# Altium PCB 6_LDCU_connector board(V21_zb).PcbDoc (part 3 of 4)
Units mil, origin at the board's own origin, x right, y up, seen from the top; angles counter-clockwise.
Board outline 11811.02 x 4135 mil, 2 copper layers (Top, Bottom), stack 12.7 mil thick; 37 components, 473 nets, 963 pads, 1 vias.
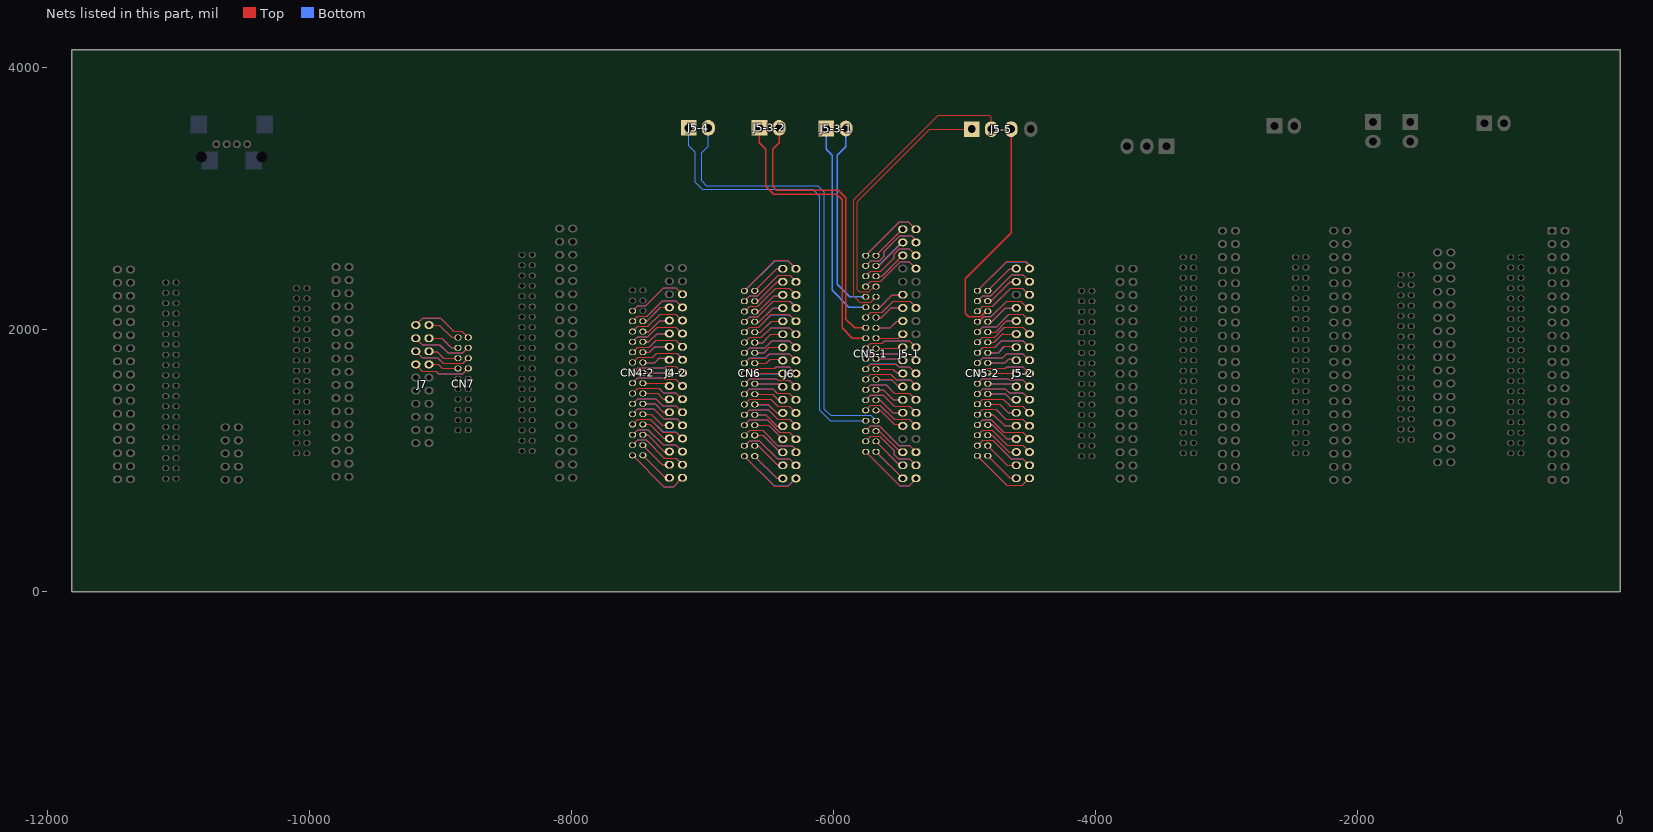
[diagram p3: the nets of this part, all layers, seen from the top]

## Via types
v1: diameter 20, hole 14, Top to Bottom, 1 vias

## Nets (pads, with @x,y where several pads share a name; then routed paths per layer and width w, separated by ;. In a path a pad name is that pad's centre, name@x,y a point inside that pad or via, vN(x,y) a via of type N, cw(c..) or ccw(c..) an arc to the next point about the centre after c; other vN are vias at no path point) (continued)
CN4-2_P6: CN4-2.6 J4-2.6 | length 949.9
  Top w7.87: CN4-2.6@-7533.86,2143.54 -7494.49,2182.91 -7432.28,2182.91 -7294.49,2320.71 -7203.54,2320.71 J4-2.6@-7153.15,2270.32
  Bottom w7.87: CN4-2.6@-7533.86,2143.54 -7494.49,2182.91 -7432.28,2182.91 -7294.49,2320.71 -7203.54,2320.71 J4-2.6@-7153.15,2270.32
CN4-2_P7: CN4-2.7 J4-2.7 | length 493.3
  Top w7.87: CN4-2.7@-7455.12,2064.8 -7426.77,2064.8 -7321.26,2170.32 J4-2.7@-7253.15,2170.32
  Bottom w7.87: CN4-2.7@-7455.12,2064.8 -7425.98,2064.8 -7318.11,2172.68 -7315.75,2170.32 J4-2.7@-7253.15,2170.32
CN4-2_P8: CN4-2.8 J4-2.8 | length 934.3
  Top w7.87: CN4-2.8@-7533.86,2064.8 -7494.49,2104.17 -7423.62,2104.17 -7305.91,2221.89 -7204.72,2221.89 J4-2.8@-7153.15,2170.32
  Bottom w7.87: CN4-2.8@-7533.86,2064.8 -7494.09,2104.57 -7422.44,2104.57 -7305.12,2221.89 -7204.72,2221.89 J4-2.8@-7153.15,2170.32
CN4-2_P9: CN4-2.9 J4-2.9 | length 473.7
  Top w7.87: CN4-2.9@-7455.12,1986.06 -7411.81,1986.06 -7327.56,2070.32 J4-2.9@-7253.15,2070.32
  Bottom w7.87: CN4-2.9@-7455.12,1986.06 -7411.02,1986.06 -7326.77,2070.32 J4-2.9@-7253.15,2070.32
CN4-2_P10: CN4-2.10 J4-2.10 | length 913.4
  Top w7.87: CN4-2.10@-7533.86,1986.06 -7494.49,2025.43 -7416.14,2025.43 -7321.65,2119.92 -7202.76,2119.92 J4-2.10@-7153.15,2070.32
  Bottom w7.87: CN4-2.10@-7533.86,1986.06 -7494.88,2025.04 -7417.72,2025.04 -7322.83,2119.92 -7202.76,2119.92 J4-2.10@-7153.15,2070.32
CN4-2_P11: CN4-2.11 J4-2.11 | length 456.1
  Top w7.87: CN4-2.11@-7455.12,1907.32 -7409.84,1907.32 -7346.85,1970.32 J4-2.11@-7253.15,1970.32
  Bottom w7.87: CN4-2.11@-7455.12,1907.32 -7408.66,1907.32 -7345.67,1970.32 J4-2.11@-7253.15,1970.32
CN4-2_P12: CN4-2.12 J4-2.12 | length 895.8
  Top w7.87: CN4-2.12@-7533.86,1907.32 -7494.49,1946.69 -7419.69,1946.69 -7346.46,2019.92 -7202.76,2019.92 J4-2.12@-7153.15,1970.32
  Bottom w7.87: CN4-2.12@-7533.86,1907.32 -7493.7,1947.48 -7418.9,1947.48 -7346.46,2019.92 -7202.76,2019.92 J4-2.12@-7153.15,1970.32
CN4-2_P13: CN4-2.13 J4-2.13 | length 439.1
  Top w7.87: CN4-2.13@-7455.12,1828.58 -7403.94,1828.58 -7362.2,1870.32 J4-2.13@-7253.15,1870.32
  Bottom w7.87: CN4-2.13@-7455.12,1828.58 -7455.12,1828.19 -7405.91,1828.19 -7363.78,1870.32 J4-2.13@-7253.15,1870.32
CN4-2_P14: CN4-2.14 J4-2.14 | length 878.2
  Top w7.87: CN4-2.14@-7533.86,1828.58 -7494.49,1867.95 -7407.87,1867.95 -7355.51,1920.32 -7203.15,1920.32 J4-2.14@-7153.15,1870.32
  Bottom w7.87: CN4-2.14@-7533.86,1828.58 -7495.28,1867.17 -7406.69,1867.17 -7354.33,1919.53 -7202.76,1919.53 -7153.54,1870.32 J4-2.14@-7153.15,1870.32
CN4-2_P15: CN4-2.15 J4-2.15 | length 462.4
  Top w7.87: CN4-2.15@-7455.12,1749.84 -7364.57,1749.84 -7329.13,1785.28 -7262.2,1785.28 -7253.15,1776.22 J4-2.15@-7253.15,1770.32
  Bottom w7.87: CN4-2.15@-7455.12,1749.84 -7363.78,1749.84 -7329.53,1784.09 -7259.84,1784.09 -7259.84,1765.98 -7257.48,1765.98 J4-2.15@-7253.15,1770.32
CN4-2_P16: CN4-2.16 J4-2.16 | length 873.6
  Top w7.87: CN4-2.16@-7533.86,1749.84 -7494.49,1789.21 -7380.31,1789.21 -7349.21,1820.32 -7194.88,1820.32 -7153.15,1778.58 J4-2.16@-7153.15,1770.32
  Bottom w7.87: CN4-2.16@-7533.86,1749.84 -7493.7,1790 -7380.31,1790 -7350,1820.32 -7193.7,1820.32 -7150.79,1777.4 -7150.79,1772.68 J4-2.16@-7153.15,1770.32
CN4-2_P17: CN4-2.17 J4-2.17 | length 404.6
  Top w7.87: CN4-2.17@-7455.12,1671.1 -7253.94,1671.1 J4-2.17@-7253.15,1670.32
  Bottom w7.87: CN4-2.17@-7455.12,1671.1 -7454.33,1670.32 J4-2.17@-7253.15,1670.32
CN4-2_P18: CN4-2.18 J4-2.18 | length 846.2
  Top w7.87: CN4-2.18@-7533.86,1671.1 -7494.49,1710.47 -7285.83,1710.47 -7274.02,1722.28 -7205.12,1722.28 J4-2.18@-7153.15,1670.32
  Bottom w7.87: CN4-2.18@-7533.86,1671.1 -7494.88,1710.08 -7287.8,1710.08 -7276.38,1721.5 -7204.33,1721.5 J4-2.18@-7153.15,1670.32
CN4-2_P19: CN4-2.19 J4-2.19 | length 436.4
  Top w7.87: CN4-2.19@-7455.12,1592.36 -7266.14,1592.36 -7253.15,1579.37 J4-2.19@-7253.15,1570.32
  Bottom w7.87: CN4-2.19@-7455.12,1592.36 -7266.14,1592.36 -7248.82,1575.04 -7248.82,1574.65 J4-2.19@-7253.15,1570.32
CN4-2_P20: CN4-2.20 J4-2.20 | length 845.2
  Top w7.87: CN4-2.20@-7533.86,1592.36 -7494.49,1631.73 -7305.51,1631.73 -7296.06,1622.28 -7205.12,1622.28 J4-2.20@-7153.15,1570.32
  Bottom w7.87: CN4-2.20@-7533.86,1592.36 -7494.09,1632.13 -7305.12,1632.13 -7294.88,1621.89 -7204.72,1621.89 J4-2.20@-7153.15,1570.32
CN4-2_P21: CN4-2.21 J4-2.21 | length 439.8
  Top w7.87: CN4-2.21@-7455.12,1513.62 -7342.91,1513.62 -7299.61,1470.32 J4-2.21@-7253.15,1470.32
  Bottom w7.87: CN4-2.21@-7455.12,1513.62 -7343.31,1513.62 -7300,1470.32 J4-2.21@-7253.15,1470.32
CN4-2_P22: CN4-2.22 J4-2.22 | length 861.9
  Top w7.87: CN4-2.22@-7533.86,1513.62 -7494.88,1552.6 -7332.28,1552.6 -7300.39,1520.71 -7203.54,1520.71 J4-2.22@-7153.15,1470.32
  Bottom w7.87: CN4-2.22@-7533.86,1513.62 -7494.88,1552.6 -7331.89,1552.6 -7300,1520.71 -7203.54,1520.71 J4-2.22@-7153.15,1470.32
CN4-2_P23: CN4-2.23 J4-2.23 | length 457.4
  Top w7.87: CN4-2.23@-7455.12,1434.88 -7364.57,1434.88 -7300,1370.32 J4-2.23@-7253.15,1370.32
  Bottom w7.87: CN4-2.23@-7455.12,1434.88 -7361.81,1434.88 -7298.03,1371.1 -7253.94,1371.1 J4-2.23@-7253.15,1370.32
CN4-2_P24: CN4-2.24 J4-2.24 | length 880.1
  Top w7.87: CN4-2.24@-7533.86,1434.88 -7494.49,1474.25 -7356.3,1474.25 -7301.57,1419.53 -7202.36,1419.53 J4-2.24@-7153.15,1370.32
  Bottom w7.87: CN4-2.24@-7533.86,1434.88 -7494.49,1474.25 -7356.3,1474.25 -7301.97,1419.92 -7202.76,1419.92 J4-2.24@-7153.15,1370.32
CN4-2_P25: CN4-2.25 J4-2.25 | length 475
  Top w7.87: CN4-2.25@-7455.12,1356.14 -7391.34,1356.14 -7305.51,1270.32 J4-2.25@-7253.15,1270.32
  Bottom w7.87: CN4-2.25@-7455.12,1356.14 -7391.73,1356.14 -7305.91,1270.32 J4-2.25@-7253.15,1270.32
CN4-2_P26: CN4-2.26 J4-2.26 | length 902.9
  Top w7.87: CN4-2.26@-7533.86,1356.14 -7494.49,1395.51 -7372.44,1395.51 -7296.85,1319.92 -7198.43,1319.92 -7153.15,1274.65 J4-2.26@-7153.15,1270.32
  Bottom w7.87: CN4-2.26@-7533.86,1356.14 -7494.09,1395.91 -7372.83,1395.91 -7296.06,1319.13 -7198.03,1319.13 -7156.3,1277.4 -7156.3,1273.46 J4-2.26@-7153.15,1270.32
CN4-2_P27: CN4-2.27 J4-2.27 | length 492.7
  Top w7.87: CN4-2.27@-7455.12,1277.4 -7401.97,1277.4 -7294.88,1170.32 J4-2.27@-7253.15,1170.32
  Bottom w7.87: CN4-2.27@-7455.12,1277.4 -7402.36,1277.4 -7295.28,1170.32 J4-2.27@-7253.15,1170.32
CN4-2_P28: CN4-2.28 J4-2.28 | length 916.8
  Top w7.87: CN4-2.28@-7533.86,1277.4 -7494.49,1316.77 -7399.21,1316.77 -7301.97,1219.53 -7202.36,1219.53 J4-2.28@-7153.15,1170.32
  Bottom w7.87: CN4-2.28@-7533.86,1277.4 -7493.7,1317.56 -7398.03,1317.56 -7300.79,1220.32 -7202.36,1220.32 -7152.76,1170.71 J4-2.28@-7153.15,1170.32
CN4-2_P29: CN4-2.29 J4-2.29 | length 510.3
  Top w7.87: CN4-2.29@-7455.12,1198.66 -7419.69,1198.66 -7291.34,1070.32 J4-2.29@-7253.15,1070.32
  Bottom w7.87: CN4-2.29@-7455.12,1198.66 -7419.29,1198.66 -7290.94,1070.32 J4-2.29@-7253.15,1070.32
CN4-2_P30: CN4-2.30 J4-2.30 | length 933.6
  Top w7.87: CN4-2.30@-7533.86,1198.66 -7494.49,1238.03 -7415.75,1238.03 -7300,1122.28 -7205.12,1122.28 J4-2.30@-7153.15,1070.32
  Bottom w7.87: CN4-2.30@-7533.86,1198.66 -7493.7,1238.82 -7416.93,1238.82 -7300,1121.89 -7204.72,1121.89 J4-2.30@-7153.15,1070.32
CN4-2_P31: CN4-2.31 J4-2.31 | length 527.9
  Top w7.87: CN4-2.31@-7455.12,1119.92 -7309.45,974.25 -7257.09,974.25 J4-2.31@-7253.15,970.32
  Bottom w7.87: CN4-2.31@-7455.12,1119.92 -7305.51,970.32 J4-2.31@-7253.15,970.32
CN4-2_P32: CN4-2.32 J4-2.32 | length 972.3
  Top w7.87: CN4-2.32@-7533.86,1119.92 -7494.49,1159.29 -7431.5,1159.29 -7292.52,1020.32 -7203.15,1020.32 J4-2.32@-7153.15,970.32
  Bottom w7.87: CN4-2.32@-7533.86,1119.92 -7494.88,1158.9 -7430.31,1158.9 -7292.13,1020.71 -7199.21,1020.71 -7144.09,965.59 -7148.43,965.59 J4-2.32@-7153.15,970.32
CN4-2_P33: CN4-2.33 J4-2.33 | length 545.5
  Top w7.87: CN4-2.33@-7455.12,1041.18 -7289.76,875.83 -7258.66,875.83 J4-2.33@-7253.15,870.32
  Bottom w7.87: CN4-2.33@-7455.12,1041.18 -7284.25,870.32 J4-2.33@-7253.15,870.32
CN4-2_P34: CN4-2.34 J4-2.34 | length 1014.5
  Top w7.87: CN4-2.34@-7533.86,1041.18 -7295.67,802.99 -7220.47,802.99 J4-2.34@-7153.15,870.32
  Bottom w7.87: CN4-2.34@-7533.86,1041.18 -7295.67,802.99 -7220.47,802.99 J4-2.34@-7153.15,870.32
CN5-1_P1: CN5-1.1 J5-1.1 | length 575.8
  Top w7.87: CN5-1.1@-5676.73,2565.47 -5487.76,2754.45 -5483.82,2754.45 J5-1.1@-5472.01,2766.26
  Bottom w7.87: CN5-1.1@-5676.73,2565.47 -5490.91,2751.3 -5486.97,2751.3 J5-1.1@-5472.01,2766.26
CN5-1_P2: CN5-1.2 J5-1.2 | length 1030.8
  Top w7.87: CN5-1.2@-5755.47,2565.47 -5495.63,2825.32 -5431.06,2825.32 J5-1.2@-5372.01,2766.26
  Bottom w7.87: CN5-1.2@-5755.47,2565.47 -5751.54,2569.41 -5751.54,2570.59 -5497.99,2824.13 -5429.88,2824.13 J5-1.2@-5372.01,2766.26
CN5-1_P3: CN5-1.3 J5-1.3 | length 560.8
  Top w7.87: CN5-1.3@-5676.73,2486.73 -5651.54,2486.73 J5-1.3@-5472.01,2666.26
  Bottom w7.87: CN5-1.3@-5676.73,2486.73 -5657.83,2486.73 -5475.16,2669.41 J5-1.3@-5472.01,2666.26
CN5-1_P4: CN5-1.4 J5-1.4 | length 1066.1
  Top w7.87: CN5-1.4@-5755.47,2486.73 -5753.9,2486.73 -5713.74,2526.89 -5650.35,2526.89 -5615.08,2562.16 -5615.08,2596.02 -5494.84,2716.26 -5406.26,2716.26 -5365.71,2675.71 -5365.71,2672.56 J5-1.4@-5372.01,2666.26
  Bottom w7.87: CN5-1.4@-5755.47,2486.73 -5715.31,2526.89 -5649.96,2526.89 -5614.92,2561.93 -5614.92,2597.76 -5496.02,2716.65 -5403.5,2716.65 -5370.83,2683.98 -5370.83,2667.44 J5-1.4@-5372.01,2666.26
CN5-1_P5: CN5-1.5 J5-1.5 | length 540.6
  Top w7.87: CN5-1.5@-5676.73,2407.99 -5630.28,2407.99 J5-1.5@-5472.01,2566.26
  Bottom w7.87: CN5-1.5@-5676.73,2407.99 -5631.06,2407.99 -5494.45,2544.61 -5493.66,2544.61 J5-1.5@-5472.01,2566.26
CN5-1_P6: CN5-1.6 J5-1.6 | length 1012.2
  Top w7.87: CN5-1.6@-5755.47,2407.99 -5716.1,2447.36 -5639.33,2447.36 -5538.15,2548.54 -5538.15,2574.13 -5495.63,2616.65 -5422.4,2616.65 J5-1.6@-5372.01,2566.26
  Bottom w7.87: CN5-1.6@-5755.47,2407.99 -5715.71,2447.76 -5639.72,2447.76 -5536.97,2550.51 -5536.97,2577.28 -5497.6,2616.65 -5422.4,2616.65 J5-1.6@-5372.01,2566.26
CN5-1_P7: CN5-1.7 J5-5.1 | length 1991.7
  Top w8: CN5-1.7@-5676.73,2329.25 -5691.77,2329.25 -5731.02,2290 -5806.02,2290 -5821.02,2305 -5821.02,2975 -5266.02,3530 J5-5.1@-4946.02,3530
  Top w10: J5-5.1@-4946.02,3530 J5-5.1@-4946.02,3580
CN5-1_P8: CN5-1.8 J5-1.8 | length 966.2
  Top w7.87: CN5-1.8@-5755.47,2329.25 -5716.1,2368.62 -5639.33,2368.62 -5490.12,2517.83 -5423.58,2517.83 J5-1.8@-5372.01,2466.26
  Bottom w7.87: CN5-1.8@-5755.47,2329.25 -5716.1,2368.62 -5639.72,2368.62 -5490.12,2518.23 -5423.98,2518.23 J5-1.8@-5372.01,2466.26
CN5-1_P9: CN5-1.9 J5-5.2 | length 2353.1
  Top w8: CN5-1.9@-5676.73,2250.51 -5717.24,2210 -5801.02,2210 -5846.02,2255 -5846.02,2990 -5201.02,3635 -4811.02,3635 -4796.02,3620 J5-5.2@-4796.02,3530
CN5-1_P10: CN5-1.10 J5-3-1.2 | length 1491.5
  Top w7.87: CN5-1.10@-5755.47,2250.51 CN5-1.10@-5745.51,2250.51
  Bottom w7.87: CN5-1.10@-5755.47,2250.51 CN5-1.10@-5745.51,2250.51
  Bottom w10: J5-3-1.2@-5906.02,3535 -5906.02,3395 -5971.02,3330 -5971.02,2345 -5876.54,2250.51 CN5-1.10@-5755.47,2250.51
CN5-1_P11: CN5-1.11 J5-1.11 | length 487.7
  Top w7.87: CN5-1.11@-5676.73,2171.77 -5645.24,2171.77 -5554.69,2262.32 -5475.94,2262.32 J5-1.11@-5472.01,2266.26
  Bottom w7.87: CN5-1.11@-5676.73,2171.77 -5647.2,2171.77 -5553.9,2265.08 -5473.19,2265.08 J5-1.11@-5472.01,2266.26
CN5-1_P12: CN5-1.12 J5-3-1.1 | length 1562.3
  Bottom w10: J5-3-1.1@-6056.02,3535 -6056.02,3375 -6011.02,3330 -6011.02,2300 -5882.8,2171.77 CN5-1.12@-5755.47,2171.77
CN5-1_P13: CN5-1.13 J5-1.13 | length 470.1
  Top w7.87: CN5-1.13@-5676.73,2093.03 -5635.39,2093.03 -5562.17,2166.26 J5-1.13@-5472.01,2166.26
  Bottom w7.87: CN5-1.13@-5676.73,2093.03 -5635,2093.03 -5561.77,2166.26 J5-1.13@-5472.01,2166.26
CN5-1_P14: CN5-1.14 J5-1.14 | length 924.6
  Top w7.87: CN5-1.14@-5755.47,2093.03 -5716.1,2132.4 -5631.46,2132.4 -5546.42,2217.44 -5419.25,2217.44 -5372.01,2170.2 J5-1.14@-5372.01,2166.26
  Bottom w7.87: CN5-1.14@-5755.47,2093.03 -5715.71,2132.8 -5630.28,2132.8 -5545.63,2217.44 -5416.89,2217.44 -5377.91,2178.46 -5377.91,2164.29 -5373.98,2164.29 J5-1.14@-5372.01,2166.26
CN5-1_P15: CN5-1.15 J5-1.15 | length 452.5
  Top w7.87: CN5-1.15@-5676.73,2014.29 -5567.28,2014.29 -5515.31,2066.26 J5-1.15@-5472.01,2066.26
  Bottom w7.87: CN5-1.15@-5676.73,2014.29 -5568.07,2014.29 -5517.28,2065.08 -5473.19,2065.08 J5-1.15@-5472.01,2066.26
CN5-1_P16: CN5-1.16 J5-3-2.2 | length 2165.8
  Top w10: J5-3-2.2@-6416.02,3540 -6416.02,3425 -6466.02,3375 -6466.02,3095 -6436.02,3065 -5966.02,3065 -5906.02,3005 -5906.02,2080 -5840.31,2014.29 CN5-1.16@-5755.47,2014.29
CN5-1_P17: CN5-1.17 J5-1.17 | length 434.9
  Top w7.87: CN5-1.17@-5676.73,1935.55 -5507.44,1935.55 -5487.76,1955.24 -5483.03,1955.24 J5-1.17@-5472.01,1966.26
  Bottom w7.87: CN5-1.17@-5676.73,1935.55 -5502.72,1935.55 J5-1.17@-5472.01,1966.26
CN5-1_P18: CN5-1.18 J5-3-2.1 | length 2277.7
  Top w10: J5-3-2.1@-6566.02,3540 -6566.02,3425 -6516.02,3375 -6516.02,3095 -6456.02,3035 -5981.02,3035 -5936.02,2990 -5936.02,2015 -5856.57,1935.55 CN5-1.18@-5755.47,1935.55
CN5-1_P19: CN5-1.19 J5-1.19 | length 417.3
  Top w7.87: CN5-1.19@-5676.73,1856.81 -5481.46,1856.81 J5-1.19@-5472.01,1866.26
  Bottom w7.87: CN5-1.19@-5676.73,1856.81 -5481.46,1856.81 J5-1.19@-5472.01,1866.26
CN5-1_P20: CN5-1.20 J5-1.20 | length 855.5
  Top w7.87: CN5-1.20@-5755.47,1856.81 -5716.1,1896.18 -5629.49,1896.18 -5610.98,1914.68 -5423.58,1914.68 -5389.33,1880.43 -5386.18,1880.43 J5-1.20@-5372.01,1866.26
  Bottom w7.87: CN5-1.20@-5755.47,1856.81 -5714.92,1897.36 -5628.31,1897.36 -5610.98,1914.68 -5419.65,1914.68 -5419.65,1913.9 J5-1.20@-5372.01,1866.26
CN5-1_P21: CN5-1.21 J5-1.21 | length 419.2
  Top w7.87: CN5-1.21@-5676.73,1778.07 -5483.82,1778.07 J5-1.21@-5472.01,1766.26
  Bottom w7.87: CN5-1.21@-5676.73,1778.07 -5485.79,1778.07 -5473.98,1766.26 J5-1.21@-5472.01,1766.26
CN5-1_P22: CN5-1.22 J5-1.22 | length 843.2
  Top w7.87: CN5-1.22@-5755.47,1778.07 -5715.31,1818.23 -5423.98,1818.23 J5-1.22@-5372.01,1766.26
  Bottom w7.87: CN5-1.22@-5755.47,1778.07 -5715.31,1818.23 -5423.98,1818.23 J5-1.22@-5372.01,1766.26
CN5-1_P23: CN5-1.23 J5-1.23 | length 441.1
  Top w7.87: CN5-1.23@-5676.73,1699.33 -5546.81,1699.33 -5513.74,1666.26 J5-1.23@-5472.01,1666.26
  Bottom w7.87: CN5-1.23@-5676.73,1699.33 -5547.2,1699.33 -5518.46,1670.59 -5470.83,1670.59 -5470.83,1667.44 J5-1.23@-5472.01,1666.26
CN5-1_P24: CN5-1.24 J5-1.24 | length 859.2
  Top w7.87: CN5-1.24@-5755.47,1699.33 -5716.5,1738.31 -5526.73,1738.31 -5504.29,1715.87 -5421.61,1715.87 J5-1.24@-5372.01,1666.26
  Bottom w7.87: CN5-1.24@-5755.47,1699.33 -5716.1,1738.7 -5524.37,1738.7 -5503.11,1717.44 -5423.19,1717.44 J5-1.24@-5372.01,1666.26
CN5-1_P25: CN5-1.25 J5-1.25 | length 454.5
  Top w7.87: CN5-1.25@-5676.73,1620.59 -5558.62,1620.59 -5504.29,1566.26 J5-1.25@-5472.01,1566.26
  Bottom w7.87: CN5-1.25@-5676.73,1620.59 -5675.94,1619.8 -5558.23,1619.8 -5504.69,1566.26 J5-1.25@-5472.01,1566.26
CN5-1_P26: CN5-1.26 J5-1.26 | length 884.2
  Top w7.87: CN5-1.26@-5755.47,1620.59 -5716.5,1659.57 -5564.13,1659.57 -5521.22,1616.65 -5416.89,1616.65 -5372.01,1571.77 J5-1.26@-5372.01,1566.26
  Bottom w7.87: CN5-1.26@-5755.47,1620.59 -5716.1,1659.96 -5564.13,1659.96 -5522.4,1618.23 -5416.89,1618.23 -5375.94,1577.28 -5375.94,1570.2 J5-1.26@-5372.01,1566.26
CN5-1_P27: CN5-1.27 J5-1.27 | length 472.9
  Top w7.87: CN5-1.27@-5676.73,1541.85 -5621.61,1541.85 -5546.02,1466.26 J5-1.27@-5472.01,1466.26
  Bottom w7.87: CN5-1.27@-5676.73,1541.85 -5621.61,1541.85 -5620.63,1542.83 -5544.06,1466.26 J5-1.27@-5472.01,1466.26
CN5-1_P28: CN5-1.28 J5-1.28 | length 893.5
  Top w7.87: CN5-1.28@-5755.47,1541.85 -5716.89,1580.43 -5601.14,1580.43 -5536.57,1515.87 -5421.61,1515.87 J5-1.28@-5372.01,1466.26
  Bottom w7.87: CN5-1.28@-5755.47,1541.85 -5716.89,1580.43 -5600.35,1580.43 -5535.79,1515.87 -5421.61,1515.87 J5-1.28@-5372.01,1466.26
CN5-1_P29: CN5-1.29 J5-1.29 | length 493.4
  Top w7.87: CN5-1.29@-5676.73,1463.11 -5645.24,1463.11 -5548.39,1366.26 J5-1.29@-5472.01,1366.26
  Bottom w7.87: CN5-1.29@-5676.73,1463.11 -5675.55,1464.29 -5675.55,1466.26 -5648.78,1466.26 -5548.78,1366.26 J5-1.29@-5472.01,1366.26
CN5-1_P30: CN5-1.30 J5-1.30 | length 920.5
  Top w7.87: CN5-1.30@-5755.47,1463.11 -5716.5,1502.09 -5625.16,1502.09 -5538.94,1415.87 -5421.61,1415.87 J5-1.30@-5372.01,1366.26
  Bottom w7.87: CN5-1.30@-5755.47,1463.11 -5716.89,1501.69 -5622.4,1501.69 -5536.97,1416.26 -5420.83,1416.26 -5368.46,1363.9 -5369.65,1363.9 J5-1.30@-5372.01,1366.26
CN5-1_P31: CN5-1.31 J5-1.31 | length 515.8
  Top w7.87: CN5-1.31@-5676.73,1384.37 -5645.24,1384.37 -5538.94,1278.07 -5483.82,1278.07 J5-1.31@-5472.01,1266.26
  Bottom w7.87: CN5-1.31@-5676.73,1384.37 -5643.66,1384.37 -5538.15,1278.86 -5471.22,1278.86 -5471.22,1267.05 J5-1.31@-5472.01,1266.26
CN5-1_P32: CN5-1.32 J5-1.32 | length 931.3
  Top w7.87: CN5-1.32@-5755.47,1384.37 -5715.31,1424.53 -5646.02,1424.53 -5537.36,1315.87 -5421.61,1315.87 J5-1.32@-5372.01,1266.26
  Bottom w7.87: CN5-1.32@-5755.47,1384.37 -5715.31,1424.53 -5646.42,1424.53 -5537.76,1315.87 -5421.61,1315.87 J5-1.32@-5372.01,1266.26
CN5-1_P33: CN5-1.33 J5-4.2 | length 3482.2
  Bottom w7.87: J5-4.2@-6956.02,3540 -6956.02,3400 -7006.02,3350 -7006.02,3135 -6971.02,3100 -6121.02,3100 -6071.02,3050 -6071.02,1395 -6021.81,1345.79 -5716.89,1345.79 CN5-1.33@-5676.73,1305.63
CN5-1_P34: CN5-1.34 J5-4.1 | length 3444.7
  Bottom w7.87: J5-4.1@-7106.02,3540 -7106.02,3405 -7056.02,3355 -7056.02,3125 -7001.02,3070 -6161.02,3070 -6106.02,3015 -6106.02,1385 -6026.65,1305.63 CN5-1.34@-5755.47,1305.63
CN5-1_P35: CN5-1.35 J5-1.35 | length 546.4
  Top w7.87: CN5-1.35@-5676.73,1226.89 -5650.75,1226.89 -5501.14,1077.28 -5483.03,1077.28 J5-1.35@-5472.01,1066.26
  Bottom w7.87: CN5-1.35@-5676.73,1226.89 -5650.75,1226.89 -5485.39,1061.54 -5476.73,1061.54 J5-1.35@-5472.01,1066.26
CN5-1_P36: CN5-1.36 J5-1.36 | length 968.4
  Top w7.87: CN5-1.36@-5755.47,1226.89 -5715.71,1266.65 -5653.5,1266.65 -5503.5,1116.65 -5420.83,1116.65 -5372.01,1067.83 J5-1.36@-5372.01,1066.26
  Bottom w7.87: CN5-1.36@-5755.47,1226.89 -5756.26,1227.68 -5717.28,1266.65 -5651.93,1266.65 -5502.32,1117.05 -5422.8,1117.05 J5-1.36@-5372.01,1066.26
CN5-1_P37: CN5-1.37 J5-1.37 | length 571.7
  Top w7.87: CN5-1.37@-5676.73,1148.15 -5672.8,1144.21 -5672.8,1140.28 -5498.78,966.26 J5-1.37@-5472.01,966.26
  Bottom w7.87: CN5-1.37@-5676.73,1148.15 -5503.11,974.53 -5468.86,974.53 -5468.86,969.41 J5-1.37@-5472.01,966.26
CN5-1_P38: CN5-1.38 J5-1.38 | length 1016.6
  Top w7.87: CN5-1.38@-5755.47,1148.15 -5716.1,1187.52 -5648.39,1187.52 -5536.18,1075.32 -5536.18,1047.36 -5505.08,1016.26 -5422.01,1016.26 J5-1.38@-5372.01,966.26
  Bottom w7.87: CN5-1.38@-5755.47,1148.15 -5714.92,1188.7 -5649.57,1188.7 -5536.97,1076.1 -5536.97,1048.15 -5505.08,1016.26 -5422.01,1016.26 J5-1.38@-5372.01,966.26
CN5-1_P39: CN5-1.39 J5-1.39 | length 577.7
  Top w7.87: CN5-1.39@-5676.73,1069.41 -5675.16,1069.41 J5-1.39@-5472.01,866.26
  Bottom w7.87: CN5-1.39@-5676.73,1069.41 -5473.58,866.26 J5-1.39@-5472.01,866.26
CN5-1_P40: CN5-1.40 J5-1.40 | length 1033.4
  Top w7.87: CN5-1.40@-5755.47,1069.41 -5495.63,809.57 -5424.76,809.57 -5372.01,862.32 J5-1.40@-5372.01,866.26
  Bottom w7.87: CN5-1.40@-5755.47,1069.41 -5497.2,811.14 -5421.61,811.14 -5372.01,860.75 J5-1.40@-5372.01,866.26
CN5-2_P1: CN5-2.1 J5-2.1 | length 575.7
  Top w7.87: CN5-2.1@-4824.09,2297.36 -4654.8,2466.65 J5-2.1@-4606.38,2466.65
  Bottom w7.87: CN5-2.1@-4824.09,2297.36 -4654.8,2466.65 J5-2.1@-4606.38,2466.65
CN5-2_P2: CN5-2.2 J5-2.2 | length 1059.1
  Top w7.87: CN5-2.2@-4902.83,2297.36 -4678.43,2521.77 -4540.63,2521.77 -4506.38,2487.52 J5-2.2@-4506.38,2466.65
  Bottom w7.87: CN5-2.2@-4902.83,2297.36 -4680,2520.2 -4530,2520.2 -4498.9,2489.09 -4498.9,2474.13 J5-2.2@-4506.38,2466.65
CN5-2_P3: CN5-2.3 J5-2.3 | length 559
  Top w7.87: CN5-2.3@-4824.09,2218.62 -4800.47,2218.62 -4652.44,2366.65 J5-2.3@-4606.38,2366.65
  Bottom w7.87: CN5-2.3@-4824.09,2218.62 -4822.13,2220.59 -4822.13,2222.17 -4797.32,2222.17 -4652.83,2366.65 J5-2.3@-4606.38,2366.65
CN5-2_P4: CN5-2.4 J5-2.4 | length 1004.6
  Top w7.87: CN5-2.4@-4902.83,2218.62 -4862.68,2258.78 -4798.9,2258.78 -4639.84,2417.83 -4557.56,2417.83 J5-2.4@-4506.38,2366.65
  Bottom w7.87: CN5-2.4@-4902.83,2218.62 -4904.41,2220.2 -4904.41,2222.17 -4896.54,2222.17 -4860.71,2257.99 -4799.69,2257.99 -4639.84,2417.83 -4557.56,2417.83 J5-2.4@-4506.38,2366.65
CN5-2_P5: CN5-2.5 J5-5.3 | length 1798.8
  Top w10: CN5-2.5@-4824.09,2139.88 -4837.27,2139.88 -4877.15,2100 -4971.02,2100 -4996.02,2125 -4996.02,2390 -4646.02,2740 J5-5.3@-4646.02,3530 J5-5.3@-4646.02,3580
CN5-2_P6: CN5-2.6 J5-2.6 | length 990.2
  Top w7.87: CN5-2.6@-4902.83,2139.88 -4863.46,2179.25 -4788.66,2179.25 -4650.08,2317.83 -4557.56,2317.83 J5-2.6@-4506.38,2266.65
  Bottom w7.87: CN5-2.6@-4902.83,2139.88 -4862.28,2180.43 -4784.33,2180.43 -4646.93,2317.83 -4559.53,2317.83 -4509.92,2268.23 -4509.92,2262.32 -4506.38,2265.87 J5-2.6@-4506.38,2266.65
CN5-2_P7: CN5-2.7 J5-2.7 | length 522.8
  Top w7.87: CN5-2.7@-4824.09,2061.14 -4796.54,2061.14 -4691.02,2166.65 J5-2.7@-4606.38,2166.65
  Bottom w7.87: CN5-2.7@-4824.09,2061.14 -4795.35,2061.14 -4692.2,2164.29 -4608.74,2164.29 J5-2.7@-4606.38,2166.65
CN5-2_P8: CN5-2.8 J5-2.8 | length 962.5
  Top w7.87: CN5-2.8@-4902.83,2061.14 -4889.88,2061.14 -4850.51,2100.51 -4796.54,2100.51 -4680.79,2216.26 -4572.52,2216.26 -4522.91,2166.65 J5-2.8@-4506.38,2166.65
  Bottom w7.87: CN5-2.8@-4902.83,2061.14 -4889.88,2061.14 -4850.12,2100.91 -4796.14,2100.91 -4680.79,2216.26 -4572.13,2216.26 -4522.52,2166.65 J5-2.8@-4506.38,2166.65
CN5-2_P9: CN5-2.9 J5-2.9 | length 505.2
  Top w7.87: CN5-2.9@-4824.09,1982.4 -4765.04,1982.4 -4680.79,2066.65 J5-2.9@-4606.38,2066.65
  Bottom w7.87: CN5-2.9@-4824.09,1982.4 -4763.86,1982.4 -4679.61,2066.65 J5-2.9@-4606.38,2066.65
CN5-2_P10: CN5-2.10 J5-2.10 | length 946.5
  Top w7.87: CN5-2.10@-4902.83,1982.4 -4862.28,2022.95 -4755.98,2022.95 -4661.5,2117.44 -4557.17,2117.44 J5-2.10@-4506.38,2066.65
  Bottom w7.87: CN5-2.10@-4902.83,1982.4 -4897.72,1982.4 -4856.77,2023.35 -4756.38,2023.35 -4662.68,2117.05 -4556.77,2117.05 J5-2.10@-4506.38,2066.65
CN5-2_P11: CN5-2.11 J5-2.11 | length 488.3
  Top w7.87: CN5-2.11@-4824.09,1903.66 -4776.85,1903.66 -4713.86,1966.65 J5-2.11@-4606.38,1966.65
  Bottom w7.87: CN5-2.11@-4824.09,1903.66 -4775.28,1903.66 -4711.5,1967.44 -4710.71,1966.65 J5-2.11@-4606.38,1966.65
CN5-2_P12: CN5-2.12 J5-2.12 | length 928.9
  Top w7.87: CN5-2.12@-4902.83,1903.66 -4863.07,1943.43 -4769.37,1943.43 -4695.35,2017.44 -4557.17,2017.44 J5-2.12@-4506.38,1966.65
  Bottom w7.87: CN5-2.12@-4902.83,1903.66 -4900.47,1903.66 -4860.71,1943.43 -4772.52,1943.43 -4698.9,2017.05 -4556.77,2017.05 J5-2.12@-4506.38,1966.65
CN5-2_P13: CN5-2.13 J5-2.13 | length 483.9
  Top w7.87: CN5-2.13@-4824.09,1824.92 -4749.29,1824.92 -4702.05,1872.17 -4611.89,1872.17 J5-2.13@-4606.38,1866.65
  Bottom w7.87: CN5-2.13@-4824.09,1824.92 -4741.81,1824.92 -4692.99,1873.74 -4607.56,1873.74 -4607.56,1867.83 J5-2.13@-4606.38,1866.65
CN5-2_P14: CN5-2.14 J5-2.14 | length 908.7
  Top w7.87: CN5-2.14@-4902.83,1824.92 -4863.07,1864.68 -4768.58,1864.68 -4717.8,1915.47 -4555.2,1915.47 J5-2.14@-4506.38,1866.65
  Bottom w7.87: CN5-2.14@-4902.83,1824.92 -4898.11,1824.92 -4858.35,1864.68 -4772.52,1864.68 -4721.34,1915.87 -4555.59,1915.87 J5-2.14@-4506.38,1866.65
CN5-2_P15: CN5-2.15 J5-2.15 | length 475.5
  Top w7.87: CN5-2.15@-4824.09,1746.18 -4694.17,1746.18 -4666.61,1773.74 -4613.46,1773.74 J5-2.15@-4606.38,1766.65
  Bottom w7.87: CN5-2.15@-4824.09,1746.18 -4692.6,1746.18 -4661.1,1777.68 -4605.2,1777.68 -4605.2,1767.83 J5-2.15@-4606.38,1766.65
CN5-2_P16: CN5-2.16 J5-2.16 | length 894.7
  Top w7.87: CN5-2.16@-4902.83,1746.18 -4863.46,1785.55 -4709.92,1785.55 -4677.64,1817.83 -4557.56,1817.83 J5-2.16@-4506.38,1766.65
  Bottom w7.87: CN5-2.16@-4902.83,1746.18 -4898.9,1746.18 -4859.13,1785.94 -4711.1,1785.94 -4679.21,1817.83 -4557.56,1817.83 J5-2.16@-4506.38,1766.65
CN5-2_P17: CN5-2.17 J5-2.17 | length 436.1
  Top w7.87: CN5-2.17@-4824.09,1667.44 -4607.17,1667.44 J5-2.17@-4606.38,1666.65
  Bottom w7.87: CN5-2.17@-4824.09,1667.44 -4823.31,1666.65 J5-2.17@-4606.38,1666.65
CN5-2_P18: CN5-2.18 J5-2.18 | length 876.1
  Top w7.87: CN5-2.18@-4902.83,1667.44 -4862.68,1707.6 -4688.27,1707.6 -4678.82,1717.05 -4556.77,1717.05 J5-2.18@-4506.38,1666.65
  Bottom w7.87: CN5-2.18@-4902.83,1667.44 -4901.65,1667.44 -4863.86,1705.24 -4689.06,1705.24 -4676.85,1717.44 -4557.17,1717.44 J5-2.18@-4506.38,1666.65
CN5-2_P19: CN5-2.19 J5-2.19 | length 456.7
  Top w7.87: CN5-2.19@-4824.09,1588.7 -4628.43,1588.7 J5-2.19@-4606.38,1566.65
  Bottom w7.87: CN5-2.19@-4824.09,1588.7 -4623.31,1588.7 -4607.56,1572.95 -4607.56,1567.83 J5-2.19@-4606.38,1566.65
CN5-2_P20: CN5-2.20 J5-2.20 | length 876.8
  Top w7.87: CN5-2.20@-4902.83,1588.7 -4864.25,1627.28 -4669.37,1627.28 -4659.92,1617.83 -4557.56,1617.83 J5-2.20@-4506.38,1566.65
  Bottom w7.87: CN5-2.20@-4902.83,1588.7 -4898.11,1593.43 -4898.11,1595.79 -4866.22,1627.68 -4670.94,1627.68 -4660.31,1617.05 -4556.77,1617.05 J5-2.20@-4506.38,1566.65
CN5-2_P21: CN5-2.21 J5-2.21 | length 475.5
  Top w7.87: CN5-2.21@-4824.09,1509.96 -4691.42,1509.96 -4648.11,1466.65 J5-2.21@-4606.38,1466.65
  Bottom w7.87: CN5-2.21@-4824.09,1509.96 -4690.63,1509.96 -4642.2,1461.54 -4611.5,1461.54 J5-2.21@-4606.38,1466.65
CN5-2_P22: CN5-2.22 J5-2.22 | length 893.7
  Top w7.87: CN5-2.22@-4902.83,1509.96 -4863.46,1549.33 -4691.42,1549.33 -4660.31,1518.23 -4557.95,1518.23 J5-2.22@-4506.38,1466.65
  Bottom w7.87: CN5-2.22@-4902.83,1509.96 -4863.86,1548.94 -4689.06,1548.94 -4658.35,1518.23 -4557.95,1518.23 J5-2.22@-4506.38,1466.65
CN5-2_P23: CN5-2.23 J5-2.23 | length 488.9
  Top w7.87: CN5-2.23@-4824.09,1431.22 -4733.54,1431.22 -4668.98,1366.65 J5-2.23@-4606.38,1366.65
  Bottom w7.87: CN5-2.23@-4824.09,1431.22 -4732.76,1431.22 -4668.19,1366.65 J5-2.23@-4606.38,1366.65
CN5-2_P24: CN5-2.24 J5-2.24 | length 912.3
  Top w7.87: CN5-2.24@-4902.83,1431.22 -4863.46,1470.59 -4705.98,1470.59 -4651.65,1416.26 -4555.98,1416.26 J5-2.24@-4506.38,1366.65
  Bottom w7.87: CN5-2.24@-4902.83,1431.22 -4862.68,1471.38 -4705.59,1471.38 -4650.47,1416.26 -4555.98,1416.26 J5-2.24@-4506.38,1366.65
CN5-2_P25: CN5-2.25 J5-2.25 | length 506.5
  Top w7.87: CN5-2.25@-4824.09,1352.48 -4780.79,1352.48 -4694.96,1266.65 J5-2.25@-4606.38,1266.65
  Bottom w7.87: CN5-2.25@-4824.09,1352.48 -4780.39,1352.48 -4694.57,1266.65 J5-2.25@-4606.38,1266.65
CN5-2_P26: CN5-2.26 J5-2.26 | length 929.6
  Top w7.87: CN5-2.26@-4902.83,1352.48 -4863.46,1391.85 -4761.5,1391.85 -4686.69,1317.05 -4556.77,1317.05 J5-2.26@-4506.38,1266.65
  Bottom w7.87: CN5-2.26@-4902.83,1352.48 -4863.07,1392.24 -4759.92,1392.24 -4685.12,1317.44 -4557.17,1317.44 J5-2.26@-4506.38,1266.65
CN5-2_P27: CN5-2.27 J5-2.27 | length 554.8
  Top w7.87: CN5-2.27@-4824.09,1273.74 -4787.48,1273.74 -4680.39,1166.65 J5-2.27@-4606.38,1166.65
  Bottom w7.87: CN5-2.27@-4824.09,1273.74 -4835.51,1273.74 -4838.27,1276.5 -4790.63,1276.5 -4680.79,1166.65 J5-2.27@-4606.38,1166.65
CN5-2_P28: CN5-2.28 J5-2.28 | length 947.5
  Top w7.87: CN5-2.28@-4902.83,1273.74 -4863.07,1313.5 -4796.54,1313.5 -4700.87,1217.83 -4557.56,1217.83 J5-2.28@-4506.38,1166.65
  Bottom w7.87: CN5-2.28@-4902.83,1273.74 -4863.07,1313.5 -4796.54,1313.5 -4700.87,1217.83 -4557.56,1217.83 J5-2.28@-4506.38,1166.65
CN5-2_P29: CN5-2.29 J5-2.29 | length 541.8
  Top w7.87: CN5-2.29@-4824.09,1195 -4789.06,1195 -4661.1,1067.05 -4606.77,1067.05 J5-2.29@-4606.38,1066.65
  Bottom w7.87: CN5-2.29@-4824.09,1195 -4789.45,1195 -4661.5,1067.05 -4606.77,1067.05 J5-2.29@-4606.38,1066.65
CN5-2_P30: CN5-2.30 J5-2.30 | length 964.5
  Top w7.87: CN5-2.30@-4902.83,1195 -4863.46,1234.37 -4791.42,1234.37 -4674.88,1117.83 -4557.56,1117.83 J5-2.30@-4506.38,1066.65
  Bottom w7.87: CN5-2.30@-4902.83,1195 -4863.46,1234.37 -4791.42,1234.37 -4675.28,1118.23 -4557.95,1118.23 J5-2.30@-4506.38,1066.65
CN5-2_P31: CN5-2.31 J5-2.31 | length 559.4
  Top w7.87: CN5-2.31@-4824.09,1116.26 -4674.49,966.65 J5-2.31@-4606.38,966.65
  Bottom w7.87: CN5-2.31@-4824.09,1116.26 -4674.49,966.65 J5-2.31@-4606.38,966.65
CN5-2_P32: CN5-2.32 J5-2.32 | length 982.1
  Top w7.87: CN5-2.32@-4902.83,1116.26 -4863.46,1155.63 -4785.91,1155.63 -4646.93,1016.65 -4556.38,1016.65 J5-2.32@-4506.38,966.65
  Bottom w7.87: CN5-2.32@-4902.83,1116.26 -4863.46,1155.63 -4785.12,1155.63 -4645.75,1016.26 -4555.98,1016.26 J5-2.32@-4506.38,966.65
CN5-2_P33: CN5-2.33 J5-2.33 | length 577
  Top w7.87: CN5-2.33@-4824.09,1037.52 -4653.23,866.65 J5-2.33@-4606.38,866.65
  Bottom w7.87: CN5-2.33@-4824.09,1037.52 -4653.23,866.65 J5-2.33@-4606.38,866.65
CN5-2_P34: CN5-2.34 J5-2.34 | length 1023.2
  Top w7.87: CN5-2.34@-4902.83,1037.52 -4678.43,813.11 -4559.92,813.11 J5-2.34@-4506.38,866.65
  Bottom w7.87: CN5-2.34@-4902.83,1037.52 -4678.43,813.11 -4559.92,813.11 J5-2.34@-4506.38,866.65
CN6_P1: CN6.1 J6.1 | length 567.8
  Top w7.87: CN6.1@-6601.46,2296.02 -6432.17,2465.32 J6.1@-6387.68,2465.32
  Bottom w7.87: CN6.1@-6601.46,2296.02 -6432.17,2465.32 J6.1@-6387.68,2465.32
CN6_P2: CN6.2 J6.2 | length 1043.8
  Top w7.87: CN6.2@-6680.2,2296.02 -6447.91,2528.31 -6350.67,2528.31 J6.2@-6287.68,2465.32
  Bottom w7.87: CN6.2@-6680.2,2296.02 -6685.71,2301.54 -6685.71,2307.44 -6666.81,2307.44 -6446.34,2527.91 -6350.28,2527.91 J6.2@-6287.68,2465.32
CN6_P3: CN6.3 J6.3 | length 550.2
  Top w7.87: CN6.3@-6601.46,2217.28 -6577.83,2217.28 -6429.8,2365.32 J6.3@-6387.68,2365.32
  Bottom w7.87: CN6.3@-6601.46,2217.28 -6578.23,2217.28 -6431.38,2364.13 -6388.86,2364.13 J6.3@-6387.68,2365.32
CN6_P4: CN6.4 J6.4 | length 988.6
  Top w7.87: CN6.4@-6680.2,2217.28 -6640.04,2257.44 -6578.23,2257.44 -6421.54,2414.13 -6336.5,2414.13 J6.4@-6287.68,2365.32
  Bottom w7.87: CN6.4@-6680.2,2217.28 -6640.04,2257.44 -6579.41,2257.44 -6422.72,2414.13 -6336.5,2414.13 J6.4@-6287.68,2365.32
CN6_P5: CN6.5 J6.5 | length 532.6
  Top w7.87: CN6.5@-6601.46,2138.54 -6573.9,2138.54 -6451.85,2260.59 -6392.4,2260.59 J6.5@-6387.68,2265.32
  Bottom w7.87: CN6.5@-6601.46,2138.54 -6574.29,2138.54 -6453.03,2259.8 -6393.19,2259.8 J6.5@-6387.68,2265.32
CN6_P6: CN6.6 J6.6 | length 973.9
  Top w7.87: CN6.6@-6680.2,2138.54 -6640.83,2177.91 -6577.83,2177.91 -6439.65,2316.1 -6338.46,2316.1 J6.6@-6287.68,2265.32
  Bottom w7.87: CN6.6@-6680.2,2138.54 -6641.22,2177.52 -6578.23,2177.52 -6440.04,2315.71 -6338.07,2315.71 J6.6@-6287.68,2265.32
CN6_P7: CN6.7 J6.7 | length 541.9
  Top w7.87: CN6.7@-6601.46,2059.8 -6566.02,2059.8 -6460.51,2165.32 J6.7@-6387.68,2165.32
  Bottom w7.87: CN6.7@-6601.46,2059.8 -6566.81,2059.8 -6460.12,2166.5 -6374.69,2166.5 -6375.87,2165.32 J6.7@-6387.68,2165.32
CN6_P8: CN6.8 J6.8 | length 973.6
  Top w7.87: CN6.8@-6680.2,2059.8 -6640.83,2099.17 -6577.83,2099.17 -6460.91,2216.1 -6338.46,2216.1 J6.8@-6287.68,2165.32
  Bottom w7.87: CN6.8@-6680.2,2059.8 -6640.43,2099.57 -6577.83,2099.57 -6460.91,2216.5 -6331.38,2216.5 -6294.37,2179.49 -6294.37,2159.41 -6293.58,2159.41 J6.8@-6287.68,2165.32
CN6_P9: CN6.9 J6.9 | length 497.4
  Top w7.87: CN6.9@-6601.46,1981.06 -6558.15,1981.06 -6473.9,2065.32 J6.9@-6387.68,2065.32
  Bottom w7.87: CN6.9@-6601.46,1981.06 -6557.76,1981.06 -6473.5,2065.32 J6.9@-6387.68,2065.32
CN6_P10: CN6.10 J6.10 | length 939
  Top w7.87: CN6.10@-6680.2,1981.06 -6640.83,2020.43 -6569.96,2020.43 -6473.9,2116.5 -6338.86,2116.5 J6.10@-6287.68,2065.32
  Bottom w7.87: CN6.10@-6680.2,1981.06 -6679.41,1981.06 -6640.83,2019.65 -6572.72,2019.65 -6476.65,2115.71 -6338.07,2115.71 J6.10@-6287.68,2065.32
CN6_P11: CN6.11 J6.11 | length 479.7
  Top w7.87: CN6.11@-6601.46,1902.32 -6543.19,1902.32 -6480.2,1965.32 J6.11@-6387.68,1965.32
  Bottom w7.87: CN6.11@-6601.46,1902.32 -6541.61,1902.32 -6478.62,1965.32 J6.11@-6387.68,1965.32
CN6_P12: CN6.12 J6.12 | length 922
  Top w7.87: CN6.12@-6680.2,1902.32 -6640.83,1941.69 -6550.28,1941.69 -6475.47,2016.5 -6338.86,2016.5 J6.12@-6287.68,1965.32
  Bottom w7.87: CN6.12@-6680.2,1902.32 -6641.22,1941.3 -6551.46,1941.3 -6476.26,2016.5 -6338.86,2016.5 J6.12@-6287.68,1965.32
CN6_P13: CN6.13 J6.13 | length 462.1
  Top w7.87: CN6.13@-6601.46,1823.58 -6534.53,1823.58 -6492.8,1865.32 J6.13@-6387.68,1865.32
  Bottom w7.87: CN6.13@-6601.46,1823.58 -6530.98,1823.58 -6489.25,1865.32 J6.13@-6387.68,1865.32
CN6_P14: CN6.14 J6.14 | length 900.8
  Top w7.87: CN6.14@-6680.2,1823.58 -6640.12,1863.66 -6522.01,1863.66 -6471.54,1914.13 -6336.5,1914.13 J6.14@-6287.68,1865.32
  Bottom w7.87: CN6.14@-6680.2,1823.58 -6640.12,1863.66 -6520.43,1863.66 -6469.57,1914.53 -6336.89,1914.53 J6.14@-6287.68,1865.32
CN6_P15: CN6.15 J6.15 | length 469.2
  Top w7.87: CN6.15@-6601.46,1744.84 -6514.84,1744.84 -6483.35,1776.34 -6398.7,1776.34 J6.15@-6387.68,1765.32
  Bottom w7.87: CN6.15@-6601.46,1744.84 -6512.48,1744.84 -6480.98,1776.34 -6387.68,1776.34 J6.15@-6387.68,1765.32
CN6_P16: CN6.16 J6.16 | length 886
  Top w7.87: CN6.16@-6680.2,1744.84 -6640.83,1784.21 -6522.72,1784.21 -6491.22,1815.71 -6338.07,1815.71 J6.16@-6287.68,1765.32
  Bottom w7.87: CN6.16@-6680.2,1744.84 -6640.43,1784.61 -6517.6,1784.61 -6486.5,1815.71 -6337.28,1815.71 -6289.65,1768.07 -6289.65,1767.28 J6.16@-6287.68,1765.32
CN6_P17: CN6.17 J6.17 | length 428.2
  Top w7.87: CN6.17@-6601.46,1666.1 -6388.46,1666.1 J6.17@-6387.68,1665.32
  Bottom w7.87: CN6.17@-6601.46,1666.1 -6600.67,1665.32 J6.17@-6387.68,1665.32
CN6_P18: CN6.18 J6.18 | length 870.3
  Top w7.87: CN6.18@-6680.2,1666.1 -6640.83,1705.47 -6447.91,1705.47 -6436.5,1716.89 -6337.28,1716.89 -6317.99,1697.6 -6317.99,1695.63 J6.18@-6287.68,1665.32
  Bottom w7.87: CN6.18@-6680.2,1666.1 -6679.02,1666.1 -6639.25,1705.87 -6447.52,1705.87 -6437.28,1716.1 -6338.46,1716.1 J6.18@-6287.68,1665.32
CN6_P19: CN6.19 J6.19 | length 447.5
  Top w7.87: CN6.19@-6601.46,1587.36 -6409.72,1587.36 J6.19@-6387.68,1565.32
  Bottom w7.87: CN6.19@-6601.46,1587.36 -6413.66,1587.36 -6411.69,1589.33 J6.19@-6387.68,1565.32
CN6_P20: CN6.20 J6.20 | length 869.2
  Top w7.87: CN6.20@-6680.2,1587.36 -6640.43,1627.13 -6436.5,1627.13 -6423.9,1614.53 -6336.89,1614.53 J6.20@-6287.68,1565.32
  Bottom w7.87: CN6.20@-6680.2,1587.36 -6640.43,1627.13 -6436.1,1627.13 -6423.5,1614.53 -6336.89,1614.53 J6.20@-6287.68,1565.32
CN6_P21: CN6.21 J6.21 | length 463.4
  Top w7.87: CN6.21@-6601.46,1508.62 -6467.6,1508.62 -6424.29,1465.32 J6.21@-6387.68,1465.32
  Bottom w7.87: CN6.21@-6601.46,1508.62 -6464.45,1508.62 -6421.14,1465.32 J6.21@-6387.68,1465.32
CN6_P22: CN6.22 J6.22 | length 886.1
  Top w7.87: CN6.22@-6680.2,1508.62 -6640.83,1547.99 -6464.84,1547.99 -6433.35,1516.5 -6338.86,1516.5 J6.22@-6287.68,1465.32
  Bottom w7.87: CN6.22@-6680.2,1508.62 -6640.83,1547.99 -6463.27,1547.99 -6431.77,1516.5 -6338.86,1516.5 J6.22@-6287.68,1465.32
CN6_P23: CN6.23 J6.23 | length 481
  Top w7.87: CN6.23@-6601.46,1429.88 -6499.09,1429.88 -6434.53,1365.32 J6.23@-6387.68,1365.32
  Bottom w7.87: CN6.23@-6601.46,1429.88 -6600.28,1428.7 -6497.52,1428.7 -6434.13,1365.32 J6.23@-6387.68,1365.32
CN6_P24: CN6.24 J6.24 | length 906.9
  Top w7.87: CN6.24@-6680.2,1429.88 -6639.65,1470.43 -6480.59,1470.43 -6425.87,1415.71 -6338.07,1415.71 J6.24@-6287.68,1365.32
  Bottom w7.87: CN6.24@-6680.2,1429.88 -6639.65,1470.43 -6479.02,1470.43 -6424.69,1416.1 -6336.5,1416.1 -6336.5,1414.13 J6.24@-6287.68,1365.32
CN6_P25: CN6.25 J6.25 | length 498.7
  Top w7.87: CN6.25@-6601.46,1351.14 -6518.78,1351.14 -6432.95,1265.32 J6.25@-6387.68,1265.32
  Bottom w7.87: CN6.25@-6601.46,1351.14 -6517.6,1351.14 -6431.77,1265.32 J6.25@-6387.68,1265.32
CN6_P26: CN6.26 J6.26 | length 923.5
  Top w7.87: CN6.26@-6680.2,1351.14 -6640.83,1390.51 -6499.09,1390.51 -6424.29,1315.71 -6337.68,1315.71 -6298.31,1276.34 -6298.31,1275.94 J6.26@-6287.68,1265.32
  Bottom w7.87: CN6.26@-6680.2,1351.14 -6640.43,1390.91 -6499.49,1390.91 -6424.29,1315.71 -6336.5,1315.71 -6286.89,1266.1 J6.26@-6287.68,1265.32
CN6_P27: CN6.27 J6.27 | length 516.3
  Top w7.87: CN6.27@-6601.46,1272.4 -6494.76,1272.4 J6.27@-6387.68,1165.32
  Bottom w7.87: CN6.27@-6601.46,1272.4 -6494.76,1272.4 J6.27@-6387.68,1165.32
CN6_P28: CN6.28 J6.28 | length 939
  Top w7.87: CN6.28@-6680.2,1272.4 -6640.43,1312.17 -6507.36,1312.17 -6412.48,1217.28 -6339.65,1217.28 J6.28@-6287.68,1165.32
  Bottom w7.87: CN6.28@-6680.2,1272.4 -6641.22,1311.38 -6506.97,1311.38 -6412.87,1217.28 -6340.04,1217.28 -6288.07,1165.32 J6.28@-6287.68,1165.32
CN6_P29: CN6.29 J6.29 | length 538.5
  Top w7.87: CN6.29@-6601.46,1193.66 -6538.86,1193.66 -6418.39,1073.19 -6418.39,1065.32 J6.29@-6387.68,1065.32
  Bottom w7.87: CN6.29@-6601.46,1193.66 -6537.28,1193.66 -6408.94,1065.32 J6.29@-6387.68,1065.32
CN6_P30: CN6.30 J6.30 | length 984.4
  Top w7.87: CN6.30@-6680.2,1193.66 -6640.04,1233.82 -6542.01,1233.82 -6424.69,1116.5 -6315.63,1116.5 -6287.68,1088.54 J6.30@-6287.68,1065.32
  Bottom w7.87: CN6.30@-6680.2,1193.66 -6640.04,1233.82 -6542.4,1233.82 -6425.08,1116.5 -6316.81,1116.5 -6289.25,1088.94 -6289.25,1066.89 J6.30@-6287.68,1065.32
CN6_P31: CN6.31 J6.31 | length 551.5
  Top w7.87: CN6.31@-6601.46,1114.92 -6574.29,1114.92 -6424.69,965.32 J6.31@-6387.68,965.32
  Bottom w7.87: CN6.31@-6601.46,1114.92 -6574.69,1114.92 -6425.08,965.32 J6.31@-6387.68,965.32
CN6_P32: CN6.32 J6.32 | length 974.5
  Top w7.87: CN6.32@-6680.2,1114.92 -6640.83,1154.29 -6567.2,1154.29 -6429.41,1016.5 -6338.86,1016.5 J6.32@-6287.68,965.32
  Bottom w7.87: CN6.32@-6680.2,1114.92 -6640.43,1154.69 -6566.02,1154.69 -6427.44,1016.1 -6338.46,1016.1 J6.32@-6287.68,965.32
CN6_P33: CN6.33 J6.33 | length 571.2
  Top w7.87: CN6.33@-6601.46,1036.18 -6430.59,865.32 J6.33@-6387.68,865.32
  Bottom w7.87: CN6.33@-6601.46,1036.18 -6601.46,1032.64 -6434.13,865.32 J6.33@-6387.68,865.32
CN6_P34: CN6.34 J6.34 | length 1021.5
  Top w7.87: CN6.34@-6680.2,1036.18 -6451.06,807.05 -6345.94,807.05 J6.34@-6287.68,865.32
  Bottom w7.87: CN6.34@-6680.2,1036.18 -6453.03,809.02 -6344.37,809.02 -6290.83,862.56 -6290.43,862.56 J6.34@-6287.68,865.32
CN7_P1: CN7.1 J7.1 | length 969.4
  Top w7.87: J7.1@-9187.2,2035.32 -9132.09,2090.43 -8999.41,2090.43 -8897.83,1988.86 -8834.84,1988.86 CN7.1@-8786.81,1940.83
  Bottom w7.87: J7.1@-9187.2,2035.32 -9133.27,2089.25 -8995.47,2089.25 -8895.87,1989.65 -8835.63,1989.65 CN7.1@-8786.81,1940.83
CN7_P2: CN7.2 J7.2 | length 521.6
  Top w7.87: J7.2@-9087.2,2035.32 -9007.28,2035.32 -8912.8,1940.83 CN7.2@-8865.55,1940.83
  Bottom w7.87: J7.2@-9087.2,2035.32 -9008.86,2035.32 -8914.37,1940.83 CN7.2@-8865.55,1940.83
CN7_P3: CN7.3 J7.3 | length 930.4
  Top w7.87: J7.3@-9187.2,1935.32 -9136.81,1884.92 -9002.56,1884.92 -8940.35,1822.72 -8826.18,1822.72 CN7.3@-8786.81,1862.09
  Bottom w7.87: J7.3@-9187.2,1935.32 -9136.81,1884.92 -9006.89,1884.92 -8944.69,1822.72 -8828.15,1822.72 -8797.83,1853.03 -8797.83,1859.33 -8795.08,1862.09 CN7.3@-8786.81,1862.09
CN7_P4: CN7.4 J7.4 | length 504
  Top w7.87: J7.4@-9087.2,1935.32 -8986.02,1935.32 -8912.8,1862.09 CN7.4@-8865.55,1862.09
  Bottom w7.87: J7.4@-9087.2,1935.32 -8988.39,1935.32 -8915.16,1862.09 CN7.4@-8865.55,1862.09
CN7_P5: CN7.5 J7.5 | length 908.7
  Top w7.87: J7.5@-9187.2,1835.32 -9137.99,1786.1 -9021.85,1786.1 -8979.72,1743.98 -8826.18,1743.98 CN7.5@-8786.81,1783.35
  Bottom w7.87: J7.5@-9187.2,1835.32 -9138.78,1786.89 -9021.46,1786.89 -8978.94,1744.37 -8829.72,1744.37 -8790.75,1783.35 CN7.5@-8786.81,1783.35
CN7_P6: CN7.6 J7.6 | length 488.7
  Top w7.87: J7.6@-9087.2,1835.32 -9082.48,1830.59 -9023.03,1830.59 -8975.79,1783.35 CN7.6@-8865.55,1783.35
  Bottom w7.87: J7.6@-9087.2,1835.32 -9086.42,1834.53 -9086.42,1830.59 -9023.43,1830.59 -8976.18,1783.35 CN7.6@-8865.55,1783.35
CN7_P7: CN7.7 J7.7 | length 891.8
  Top w7.87: J7.7@-9187.2,1735.32 -9136.42,1684.53 -9030.51,1684.53 -9011.22,1665.24 -8826.18,1665.24 CN7.7@-8786.81,1704.61
  Bottom w7.87: J7.7@-9187.2,1735.32 -9136.81,1684.92 -9034.45,1684.92 -9014.37,1664.84 -8828.15,1664.84 -8788.39,1704.61 CN7.7@-8786.81,1704.61
CN7_P8: CN7.8 J7.8 | length 468.7
  Top w7.87: J7.8@-9087.2,1735.32 -9014.37,1735.32 -8983.66,1704.61 CN7.8@-8865.55,1704.61
  Bottom w7.87: J7.8@-9087.2,1735.32 -9016.34,1735.32 -8985.63,1704.61 CN7.8@-8865.55,1704.61